# EAGLE board led_buzzer_panel (EAGLE 5.11)
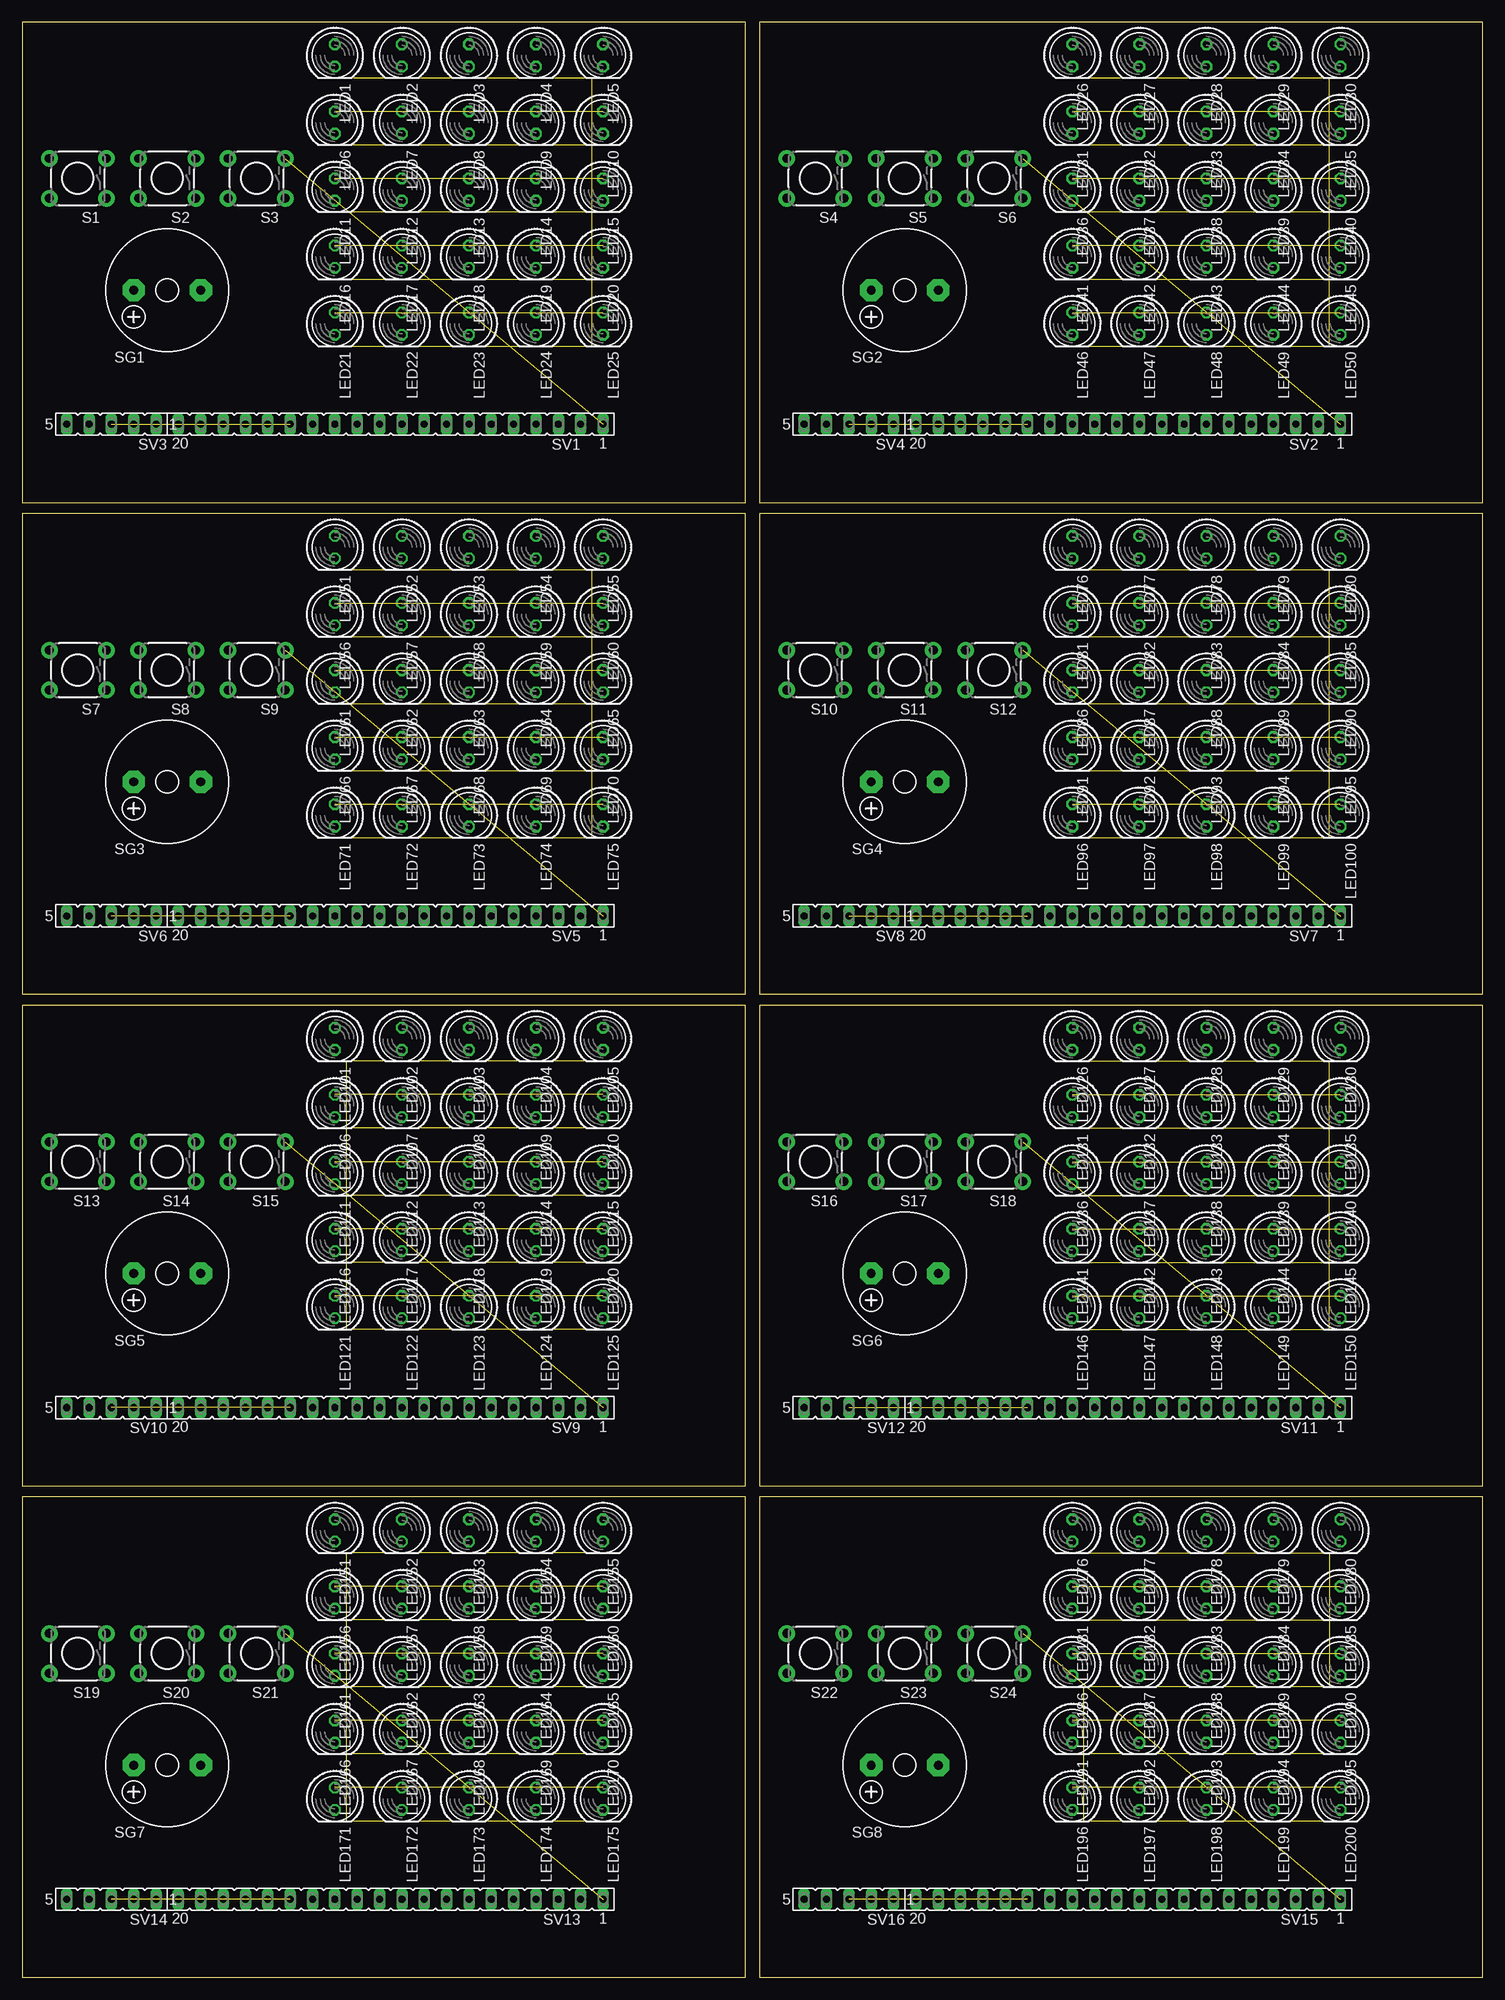
[diagram p0: board, top side]
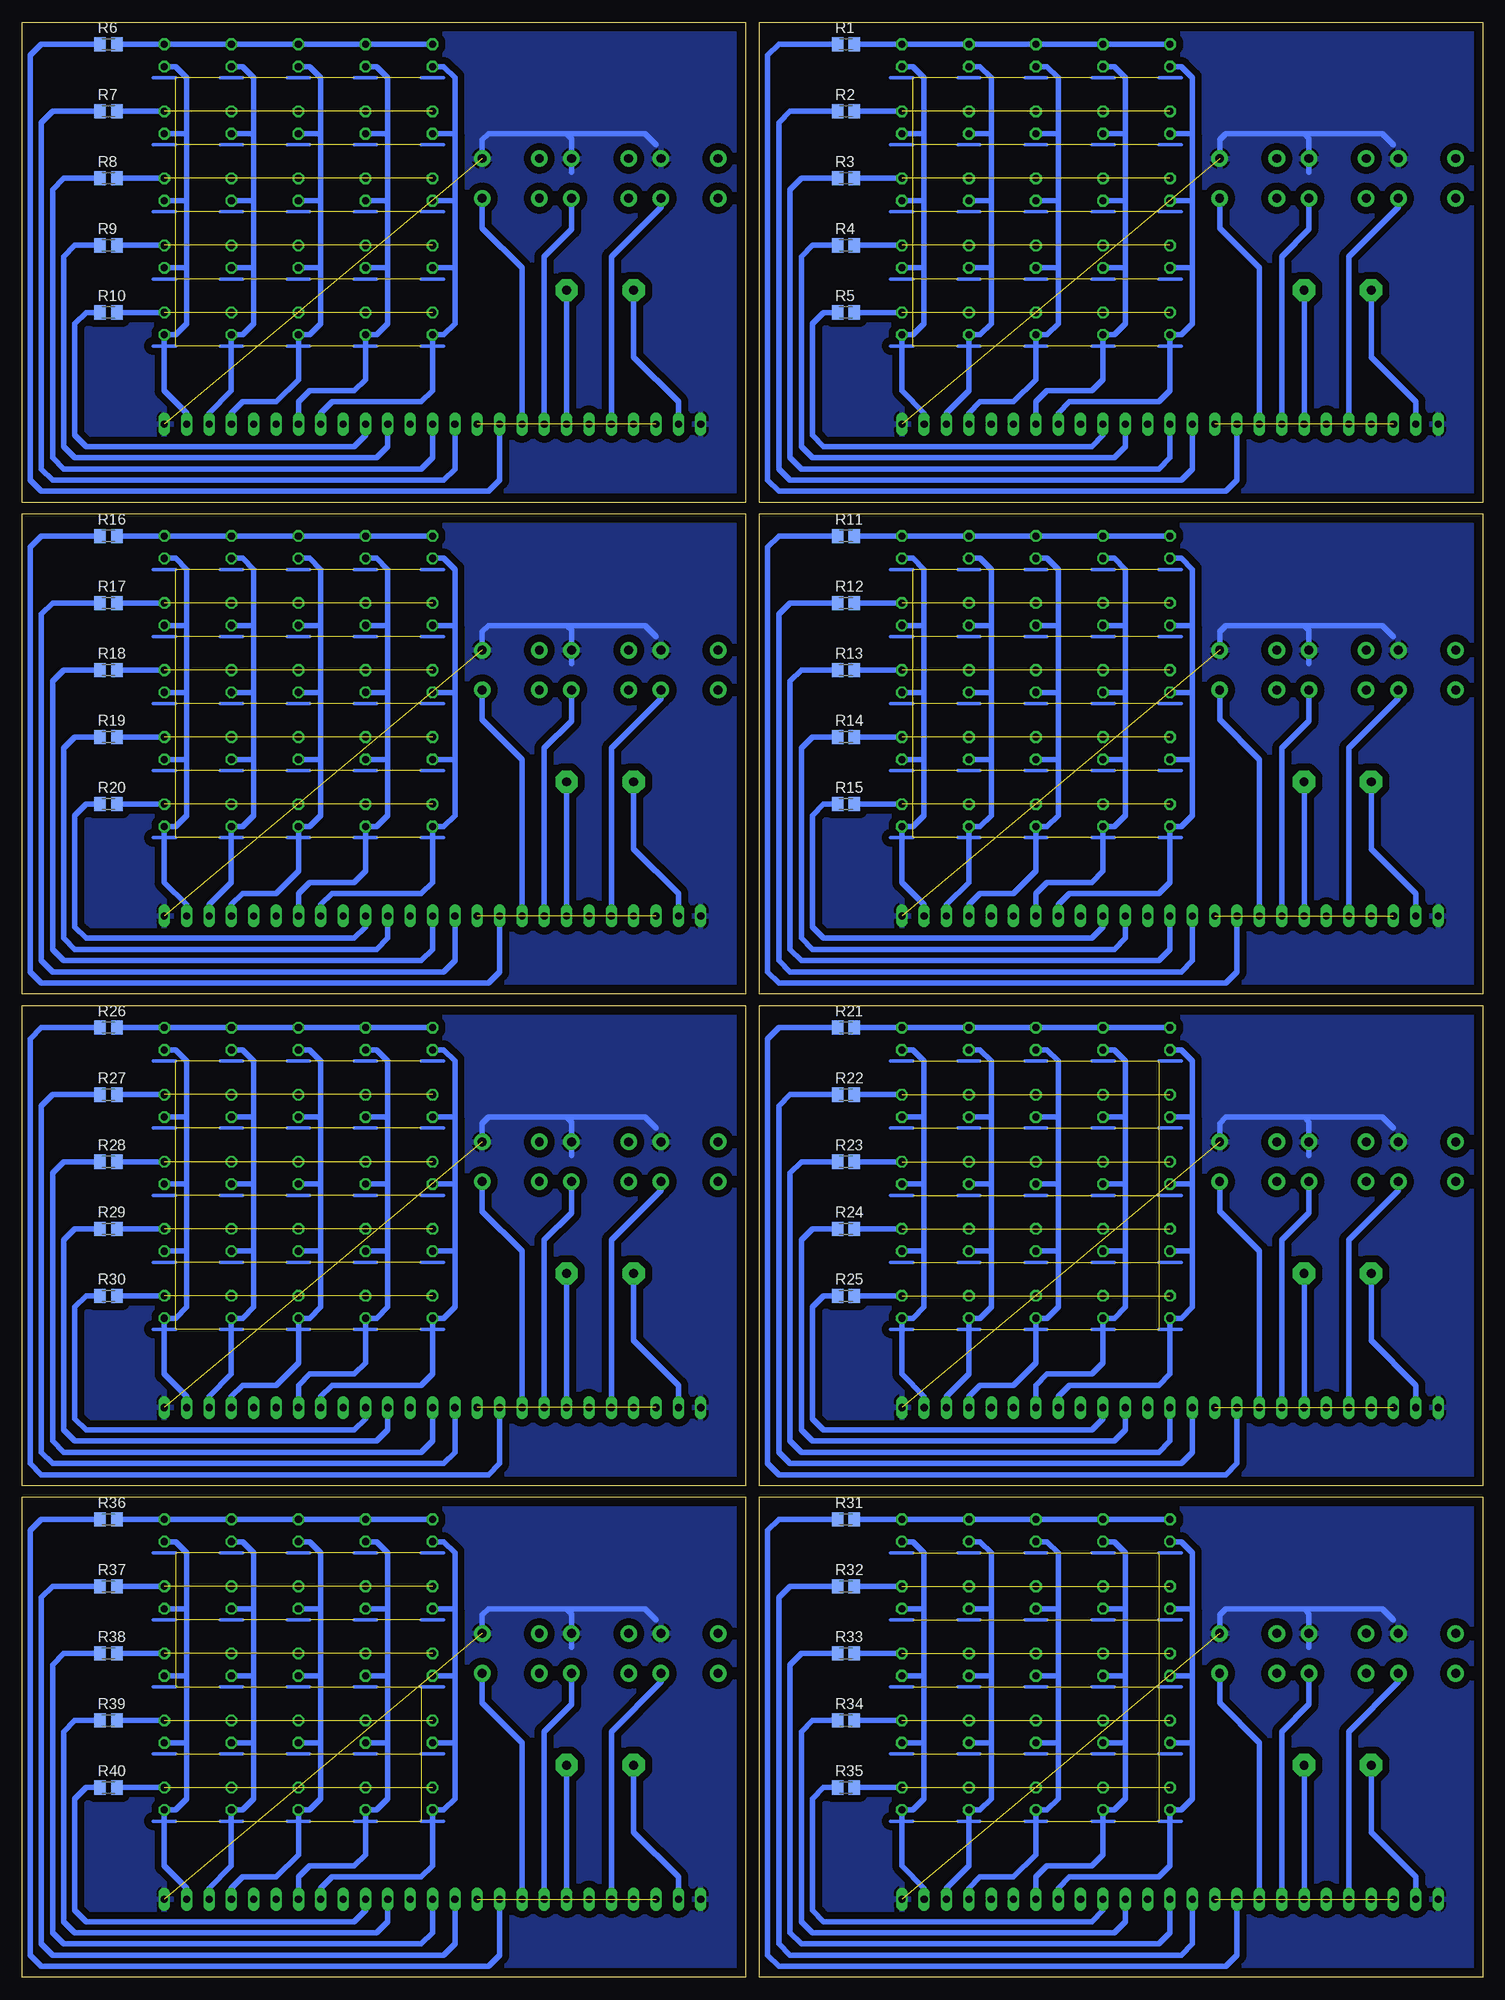
[diagram p1: board, bottom side, seen from below]

Size 166.04 x 222.24 mm. Coordinates in mm from the lower left corner, seen from the top.
Outline: 0,167.64 82.22,167.64 82.22,222.24 0,222.24 0,167.64
Outline: 83.82,167.64 166.04,167.64 166.04,222.24 83.82,222.24 83.82,167.64
Outline: 0,111.76 82.22,111.76 82.22,166.36 0,166.36 0,111.76
Outline: 83.82,111.76 166.04,111.76 166.04,166.36 83.82,166.36 83.82,111.76
Outline: 0,55.88 82.22,55.88 82.22,110.48 0,110.48 0,55.88
Outline: 83.82,55.88 166.04,55.88 166.04,110.48 83.82,110.48 83.82,55.88
Outline: 0,0 82.22,0 82.22,54.6 0,54.6 0,0
Outline: 83.82,0 166.04,0 166.04,54.6 83.82,54.6 83.82,0
Copper layers (1*16): Top 0.035mm / dielectric 1.5mm / Bottom 0.035mm
Design rules "default *": minimum track width 0.4mm, minimum drill 24mil, track to track 8mil, track to pad 8mil, pad to pad 8mil, via to via 8mil, smd to smd 8mil, copper to edge 40mil, drill to drill 8mil, minimum pad ring 10mil, minimum via ring 8mil, stop-mask expansion 4mil, vias tented up to drill 0mil, thermal gap 10mil

## Footprints (pad centres in the part's own frame; a part is rotated, then mirrored left to right if it is on the bottom)
LED5MM = drill 0.813 octagon: A -1.27,0; K 1.27,0
M0805 = smd 1.3 x 1.6: 1 -0.95,0; 2 0.95,0
TACTILE-PTH = drill 1.016 pad 1.88 round: 1 -3.251,2.261; 2 3.251,2.261; 3 -3.251,-2.261; 4 3.251,-2.261
F/CM12P = drill 1.016 pad 2.54 octagon: + 3.81,0; - -3.81,0
FE20 = drill 0.813 long: 1 -24.13,0; 2 -21.59,0; 3 -19.05,0; 4 -16.51,0; 5 -13.97,0; 6 -11.43,0; 7 -8.89,0; 8 -6.35,0; 9 -3.81,0; 10 -1.27,0; 11 1.27,0; 12 3.81,0; 13 6.35,0; 14 8.89,0; 15 11.43,0; 16 13.97,0; 17 16.51,0; 18 19.05,0; 19 21.59,0; 20 24.13,0
FE05-1 = drill 0.813 long: 1 -5.08,0; 2 -2.54,0; 3 0,0; 4 2.54,0; 5 5.08,0

## Placement (x,y rotation side)
LED1  [LED5MM]  35.56,218.44 270 top
LED2  [LED5MM]  43.18,218.44 270 top
LED3  [LED5MM]  50.8,218.44 270 top
LED4  [LED5MM]  58.42,218.44 270 top
LED5  [LED5MM]  66.04,218.44 270 top
LED6  [LED5MM]  35.56,210.82 270 top
LED7  [LED5MM]  43.18,210.82 270 top
LED8  [LED5MM]  50.8,210.82 270 top
LED9  [LED5MM]  58.42,210.82 270 top
LED10  [LED5MM]  66.04,210.82 270 top
LED11  [LED5MM]  35.56,203.2 270 top
LED12  [LED5MM]  43.18,203.2 270 top
LED13  [LED5MM]  50.8,203.2 270 top
LED14  [LED5MM]  58.42,203.2 270 top
LED15  [LED5MM]  66.04,203.2 270 top
LED16  [LED5MM]  35.56,195.58 270 top
LED17  [LED5MM]  43.18,195.58 270 top
LED18  [LED5MM]  50.8,195.58 270 top
LED19  [LED5MM]  58.42,195.58 270 top
LED20  [LED5MM]  66.04,195.58 270 top
LED21  [LED5MM]  35.56,187.96 270 top
LED22  [LED5MM]  43.18,187.96 270 top
LED23  [LED5MM]  50.8,187.96 270 top
LED24  [LED5MM]  58.42,187.96 270 top
LED25  [LED5MM]  66.04,187.96 270 top
LED26  [LED5MM]  119.38,218.44 270 top
LED27  [LED5MM]  127,218.44 270 top
LED28  [LED5MM]  134.62,218.44 270 top
LED29  [LED5MM]  142.24,218.44 270 top
LED30  [LED5MM]  149.86,218.44 270 top
LED31  [LED5MM]  119.38,210.82 270 top
LED32  [LED5MM]  127,210.82 270 top
LED33  [LED5MM]  134.62,210.82 270 top
LED34  [LED5MM]  142.24,210.82 270 top
LED35  [LED5MM]  149.86,210.82 270 top
LED36  [LED5MM]  119.38,203.2 270 top
LED37  [LED5MM]  127,203.2 270 top
LED38  [LED5MM]  134.62,203.2 270 top
LED39  [LED5MM]  142.24,203.2 270 top
LED40  [LED5MM]  149.86,203.2 270 top
LED41  [LED5MM]  119.38,195.58 270 top
LED42  [LED5MM]  127,195.58 270 top
LED43  [LED5MM]  134.62,195.58 270 top
LED44  [LED5MM]  142.24,195.58 270 top
LED45  [LED5MM]  149.86,195.58 270 top
LED46  [LED5MM]  119.38,187.96 270 top
LED47  [LED5MM]  127,187.96 270 top
LED48  [LED5MM]  134.62,187.96 270 top
LED49  [LED5MM]  142.24,187.96 270 top
LED50  [LED5MM]  149.86,187.96 270 top
LED51  [LED5MM]  35.56,162.56 270 top
LED52  [LED5MM]  43.18,162.56 270 top
LED53  [LED5MM]  50.8,162.56 270 top
LED54  [LED5MM]  58.42,162.56 270 top
LED55  [LED5MM]  66.04,162.56 270 top
LED56  [LED5MM]  35.56,154.94 270 top
LED57  [LED5MM]  43.18,154.94 270 top
LED58  [LED5MM]  50.8,154.94 270 top
LED59  [LED5MM]  58.42,154.94 270 top
LED60  [LED5MM]  66.04,154.94 270 top
LED61  [LED5MM]  35.56,147.32 270 top
LED62  [LED5MM]  43.18,147.32 270 top
LED63  [LED5MM]  50.8,147.32 270 top
LED64  [LED5MM]  58.42,147.32 270 top
LED65  [LED5MM]  66.04,147.32 270 top
LED66  [LED5MM]  35.56,139.7 270 top
LED67  [LED5MM]  43.18,139.7 270 top
LED68  [LED5MM]  50.8,139.7 270 top
LED69  [LED5MM]  58.42,139.7 270 top
LED70  [LED5MM]  66.04,139.7 270 top
LED71  [LED5MM]  35.56,132.08 270 top
LED72  [LED5MM]  43.18,132.08 270 top
LED73  [LED5MM]  50.8,132.08 270 top
LED74  [LED5MM]  58.42,132.08 270 top
LED75  [LED5MM]  66.04,132.08 270 top
LED76  [LED5MM]  119.38,162.56 270 top
LED77  [LED5MM]  127,162.56 270 top
LED78  [LED5MM]  134.62,162.56 270 top
LED79  [LED5MM]  142.24,162.56 270 top
LED80  [LED5MM]  149.86,162.56 270 top
LED81  [LED5MM]  119.38,154.94 270 top
LED82  [LED5MM]  127,154.94 270 top
LED83  [LED5MM]  134.62,154.94 270 top
LED84  [LED5MM]  142.24,154.94 270 top
LED85  [LED5MM]  149.86,154.94 270 top
LED86  [LED5MM]  119.38,147.32 270 top
LED87  [LED5MM]  127,147.32 270 top
LED88  [LED5MM]  134.62,147.32 270 top
LED89  [LED5MM]  142.24,147.32 270 top
LED90  [LED5MM]  149.86,147.32 270 top
LED91  [LED5MM]  119.38,139.7 270 top
LED92  [LED5MM]  127,139.7 270 top
LED93  [LED5MM]  134.62,139.7 270 top
LED94  [LED5MM]  142.24,139.7 270 top
LED95  [LED5MM]  149.86,139.7 270 top
LED96  [LED5MM]  119.38,132.08 270 top
LED97  [LED5MM]  127,132.08 270 top
LED98  [LED5MM]  134.62,132.08 270 top
LED99  [LED5MM]  142.24,132.08 270 top
LED100  [LED5MM]  149.86,132.08 270 top
LED101  [LED5MM]  35.56,106.68 270 top
LED102  [LED5MM]  43.18,106.68 270 top
LED103  [LED5MM]  50.8,106.68 270 top
LED104  [LED5MM]  58.42,106.68 270 top
LED105  [LED5MM]  66.04,106.68 270 top
LED106  [LED5MM]  35.56,99.06 270 top
LED107  [LED5MM]  43.18,99.06 270 top
LED108  [LED5MM]  50.8,99.06 270 top
LED109  [LED5MM]  58.42,99.06 270 top
LED110  [LED5MM]  66.04,99.06 270 top
LED111  [LED5MM]  35.56,91.44 270 top
LED112  [LED5MM]  43.18,91.44 270 top
LED113  [LED5MM]  50.8,91.44 270 top
LED114  [LED5MM]  58.42,91.44 270 top
LED115  [LED5MM]  66.04,91.44 270 top
LED116  [LED5MM]  35.56,83.82 270 top
LED117  [LED5MM]  43.18,83.82 270 top
LED118  [LED5MM]  50.8,83.82 270 top
LED119  [LED5MM]  58.42,83.82 270 top
LED120  [LED5MM]  66.04,83.82 270 top
LED121  [LED5MM]  35.56,76.2 270 top
LED122  [LED5MM]  43.18,76.2 270 top
LED123  [LED5MM]  50.8,76.2 270 top
LED124  [LED5MM]  58.42,76.2 270 top
LED125  [LED5MM]  66.04,76.2 270 top
LED126  [LED5MM]  119.38,106.68 270 top
LED127  [LED5MM]  127,106.68 270 top
LED128  [LED5MM]  134.62,106.68 270 top
LED129  [LED5MM]  142.24,106.68 270 top
LED130  [LED5MM]  149.86,106.68 270 top
LED131  [LED5MM]  119.38,99.06 270 top
LED132  [LED5MM]  127,99.06 270 top
LED133  [LED5MM]  134.62,99.06 270 top
LED134  [LED5MM]  142.24,99.06 270 top
LED135  [LED5MM]  149.86,99.06 270 top
LED136  [LED5MM]  119.38,91.44 270 top
LED137  [LED5MM]  127,91.44 270 top
LED138  [LED5MM]  134.62,91.44 270 top
LED139  [LED5MM]  142.24,91.44 270 top
LED140  [LED5MM]  149.86,91.44 270 top
LED141  [LED5MM]  119.38,83.82 270 top
LED142  [LED5MM]  127,83.82 270 top
LED143  [LED5MM]  134.62,83.82 270 top
LED144  [LED5MM]  142.24,83.82 270 top
LED145  [LED5MM]  149.86,83.82 270 top
LED146  [LED5MM]  119.38,76.2 270 top
LED147  [LED5MM]  127,76.2 270 top
LED148  [LED5MM]  134.62,76.2 270 top
LED149  [LED5MM]  142.24,76.2 270 top
LED150  [LED5MM]  149.86,76.2 270 top
LED151  [LED5MM]  35.56,50.8 270 top
LED152  [LED5MM]  43.18,50.8 270 top
LED153  [LED5MM]  50.8,50.8 270 top
LED154  [LED5MM]  58.42,50.8 270 top
LED155  [LED5MM]  66.04,50.8 270 top
LED156  [LED5MM]  35.56,43.18 270 top
LED157  [LED5MM]  43.18,43.18 270 top
LED158  [LED5MM]  50.8,43.18 270 top
LED159  [LED5MM]  58.42,43.18 270 top
LED160  [LED5MM]  66.04,43.18 270 top
LED161  [LED5MM]  35.56,35.56 270 top
LED162  [LED5MM]  43.18,35.56 270 top
LED163  [LED5MM]  50.8,35.56 270 top
LED164  [LED5MM]  58.42,35.56 270 top
LED165  [LED5MM]  66.04,35.56 270 top
LED166  [LED5MM]  35.56,27.94 270 top
LED167  [LED5MM]  43.18,27.94 270 top
LED168  [LED5MM]  50.8,27.94 270 top
LED169  [LED5MM]  58.42,27.94 270 top
LED170  [LED5MM]  66.04,27.94 270 top
LED171  [LED5MM]  35.56,20.32 270 top
LED172  [LED5MM]  43.18,20.32 270 top
LED173  [LED5MM]  50.8,20.32 270 top
LED174  [LED5MM]  58.42,20.32 270 top
LED175  [LED5MM]  66.04,20.32 270 top
LED176  [LED5MM]  119.38,50.8 270 top
LED177  [LED5MM]  127,50.8 270 top
LED178  [LED5MM]  134.62,50.8 270 top
LED179  [LED5MM]  142.24,50.8 270 top
LED180  [LED5MM]  149.86,50.8 270 top
LED181  [LED5MM]  119.38,43.18 270 top
LED182  [LED5MM]  127,43.18 270 top
LED183  [LED5MM]  134.62,43.18 270 top
LED184  [LED5MM]  142.24,43.18 270 top
LED185  [LED5MM]  149.86,43.18 270 top
LED186  [LED5MM]  119.38,35.56 270 top
LED187  [LED5MM]  127,35.56 270 top
LED188  [LED5MM]  134.62,35.56 270 top
LED189  [LED5MM]  142.24,35.56 270 top
LED190  [LED5MM]  149.86,35.56 270 top
LED191  [LED5MM]  119.38,27.94 270 top
LED192  [LED5MM]  127,27.94 270 top
LED193  [LED5MM]  134.62,27.94 270 top
LED194  [LED5MM]  142.24,27.94 270 top
LED195  [LED5MM]  149.86,27.94 270 top
LED196  [LED5MM]  119.38,20.32 270 top
LED197  [LED5MM]  127,20.32 270 top
LED198  [LED5MM]  134.62,20.32 270 top
LED199  [LED5MM]  142.24,20.32 270 top
LED200  [LED5MM]  149.86,20.32 270 top
R1  [M0805]  72.39,219.71 0 bottom
R2  [M0805]  72.39,212.09 0 bottom
R3  [M0805]  72.39,204.47 0 bottom
R4  [M0805]  72.39,196.85 0 bottom
R5  [M0805]  72.39,189.23 0 bottom
R6  [M0805]  156.21,219.71 0 bottom
R7  [M0805]  156.21,212.09 0 bottom
R8  [M0805]  156.21,204.47 0 bottom
R9  [M0805]  156.21,196.85 0 bottom
R10  [M0805]  156.21,189.23 0 bottom
R11  [M0805]  72.39,163.83 0 bottom
R12  [M0805]  72.39,156.21 0 bottom
R13  [M0805]  72.39,148.59 0 bottom
R14  [M0805]  72.39,140.97 0 bottom
R15  [M0805]  72.39,133.35 0 bottom
R16  [M0805]  156.21,163.83 0 bottom
R17  [M0805]  156.21,156.21 0 bottom
R18  [M0805]  156.21,148.59 0 bottom
R19  [M0805]  156.21,140.97 0 bottom
R20  [M0805]  156.21,133.35 0 bottom
R21  [M0805]  72.39,107.95 0 bottom
R22  [M0805]  72.39,100.33 0 bottom
R23  [M0805]  72.39,92.71 0 bottom
R24  [M0805]  72.39,85.09 0 bottom
R25  [M0805]  72.39,77.47 0 bottom
R26  [M0805]  156.21,107.95 0 bottom
R27  [M0805]  156.21,100.33 0 bottom
R28  [M0805]  156.21,92.71 0 bottom
R29  [M0805]  156.21,85.09 0 bottom
R30  [M0805]  156.21,77.47 0 bottom
R31  [M0805]  72.39,52.07 0 bottom
R32  [M0805]  72.39,44.45 0 bottom
R33  [M0805]  72.39,36.83 0 bottom
R34  [M0805]  72.39,29.21 0 bottom
R35  [M0805]  72.39,21.59 0 bottom
R36  [M0805]  156.21,52.07 0 bottom
R37  [M0805]  156.21,44.45 0 bottom
R38  [M0805]  156.21,36.83 0 bottom
R39  [M0805]  156.21,29.21 0 bottom
R40  [M0805]  156.21,21.59 0 bottom
S1  [TACTILE-PTH]  6.35,204.47 180 top
S2  [TACTILE-PTH]  16.51,204.47 180 top
S3  [TACTILE-PTH]  26.67,204.47 180 top
S4  [TACTILE-PTH]  90.17,204.47 180 top
S5  [TACTILE-PTH]  100.33,204.47 180 top
S6  [TACTILE-PTH]  110.49,204.47 180 top
S7  [TACTILE-PTH]  6.35,148.59 180 top
S8  [TACTILE-PTH]  16.51,148.59 180 top
S9  [TACTILE-PTH]  26.67,148.59 180 top
S10  [TACTILE-PTH]  90.17,148.59 180 top
S11  [TACTILE-PTH]  100.33,148.59 180 top
S12  [TACTILE-PTH]  110.49,148.59 180 top
S13  [TACTILE-PTH]  6.35,92.71 180 top
S14  [TACTILE-PTH]  16.51,92.71 180 top
S15  [TACTILE-PTH]  26.67,92.71 180 top
S16  [TACTILE-PTH]  90.17,92.71 180 top
S17  [TACTILE-PTH]  100.33,92.71 180 top
S18  [TACTILE-PTH]  110.49,92.71 180 top
S19  [TACTILE-PTH]  6.35,36.83 180 top
S20  [TACTILE-PTH]  16.51,36.83 180 top
S21  [TACTILE-PTH]  26.67,36.83 180 top
S22  [TACTILE-PTH]  90.17,36.83 180 top
S23  [TACTILE-PTH]  100.33,36.83 180 top
S24  [TACTILE-PTH]  110.49,36.83 180 top
SG1  F/CM12P  [F/CM12P]  16.51,191.77 180 top
SG2  F/CM12P  [F/CM12P]  100.33,191.77 180 top
SG3  F/CM12P  [F/CM12P]  16.51,135.89 180 top
SG4  F/CM12P  [F/CM12P]  100.33,135.89 180 top
SG5  F/CM12P  [F/CM12P]  16.51,80.01 180 top
SG6  F/CM12P  [F/CM12P]  100.33,80.01 180 top
SG7  F/CM12P  [F/CM12P]  16.51,24.13 180 top
SG8  F/CM12P  [F/CM12P]  100.33,24.13 180 top
SV1  [FE20]  41.91,176.53 180 top
SV2  [FE20]  125.73,176.53 180 top
SV3  [FE05-1]  10.16,176.53 180 top
SV4  [FE05-1]  93.98,176.53 180 top
SV5  [FE20]  41.91,120.65 180 top
SV6  [FE05-1]  10.16,120.65 180 top
SV7  [FE20]  125.73,120.65 180 top
SV8  [FE05-1]  93.98,120.65 180 top
SV9  [FE20]  41.91,64.77 180 top
SV10  [FE05-1]  10.16,64.77 180 top
SV11  [FE20]  125.73,64.77 180 top
SV12  [FE05-1]  93.98,64.77 180 top
SV13  [FE20]  41.91,8.89 180 top
SV14  [FE05-1]  10.16,8.89 180 top
SV15  [FE20]  125.73,8.89 180 top
SV16  [FE05-1]  93.98,8.89 180 top

## Library data of the parts
LED1-LED200 = led
R1-R40 = rcl
S1-S24 = SparkFun
SG1-SG8 = buzzer; OC_FARNELL: unknown; OC_NEWARK: unknown
SV1-SV16 = con-lsta; OC_FARNELL: unknown; OC_NEWARK: unknown

## Nets
+5V: SG1.+ SV3.4
+5V1: SG2.+ SV4.4
+5V2: SG3.+ SV6.4
+5V3: SG4.+ SV8.4
+5V4: SG5.+ SV10.4
+5V5: SG6.+ SV12.4
+5V6: SG7.+ SV14.4
+5V7: SG8.+ SV16.4
GND: S1.3 S2.3 S3.3 SV1.1 SV3.5
GND1: S4.3 S5.3 S6.3 SV2.1 SV4.5
GND2: S7.3 S8.3 S9.3 SV5.1 SV6.5
GND3: S10.3 S11.3 S12.3 SV7.1 SV8.5
GND4: S13.3 S14.3 S15.3 SV9.1 SV10.5
GND5: S16.3 S17.3 S18.3 SV11.1 SV12.5
GND6: S19.3 S20.3 S21.3 SV13.1 SV14.5
GND7: S22.3 S23.3 S24.3 SV15.1 SV16.5
N$1: LED1.A LED2.A LED3.A LED4.A LED5.A R1.2
N$2: LED6.A LED7.A LED8.A LED9.A LED10.A R2.2
N$3: LED11.A LED12.A LED13.A LED14.A LED15.A R3.2
N$4: LED16.A LED17.A LED18.A LED19.A LED20.A R4.2
N$5: LED21.A LED22.A LED23.A LED24.A LED25.A R5.2
N$8: LED26.A LED27.A LED28.A LED29.A LED30.A R6.2
N$9: LED31.A LED32.A LED33.A LED34.A LED35.A R7.2
N$10: LED36.A LED37.A LED38.A LED39.A LED40.A R8.2
N$11: LED41.A LED42.A LED43.A LED44.A LED45.A R9.2
N$12: LED46.A LED47.A LED48.A LED49.A LED50.A R10.2
N$15: LED51.A LED52.A LED53.A LED54.A LED55.A R11.2
N$16: LED56.A LED57.A LED58.A LED59.A LED60.A R12.2
N$17: LED61.A LED62.A LED63.A LED64.A LED65.A R13.2
N$18: LED66.A LED67.A LED68.A LED69.A LED70.A R14.2
N$19: LED71.A LED72.A LED73.A LED74.A LED75.A R15.2
N$22: LED76.A LED77.A LED78.A LED79.A LED80.A R16.2
N$23: LED81.A LED82.A LED83.A LED84.A LED85.A R17.2
N$24: LED86.A LED87.A LED88.A LED89.A LED90.A R18.2
N$25: LED91.A LED92.A LED93.A LED94.A LED95.A R19.2
N$26: LED96.A LED97.A LED98.A LED99.A LED100.A R20.2
N$29: LED101.A LED102.A LED103.A LED104.A LED105.A R21.2
N$30: LED106.A LED107.A LED108.A LED109.A LED110.A R22.2
N$31: LED111.A LED112.A LED113.A LED114.A LED115.A R23.2
N$32: LED116.A LED117.A LED118.A LED119.A LED120.A R24.2
N$33: LED121.A LED122.A LED123.A LED124.A LED125.A R25.2
N$36: LED126.A LED127.A LED128.A LED129.A LED130.A R26.2
N$37: LED131.A LED132.A LED133.A LED134.A LED135.A R27.2
N$38: LED136.A LED137.A LED138.A LED139.A LED140.A R28.2
N$39: LED141.A LED142.A LED143.A LED144.A LED145.A R29.2
N$40: LED146.A LED147.A LED148.A LED149.A LED150.A R30.2
N$43: LED151.A LED152.A LED153.A LED154.A LED155.A R31.2
N$44: LED156.A LED157.A LED158.A LED159.A LED160.A R32.2
N$45: LED161.A LED162.A LED163.A LED164.A LED165.A R33.2
N$46: LED166.A LED167.A LED168.A LED169.A LED170.A R34.2
N$47: LED171.A LED172.A LED173.A LED174.A LED175.A R35.2
N$50: LED176.A LED177.A LED178.A LED179.A LED180.A R36.2
N$51: LED181.A LED182.A LED183.A LED184.A LED185.A R37.2
N$52: LED186.A LED187.A LED188.A LED189.A LED190.A R38.2
N$53: LED191.A LED192.A LED193.A LED194.A LED195.A R39.2
N$54: LED196.A LED197.A LED198.A LED199.A LED200.A R40.2
PA1: LED28.K LED33.K LED38.K LED43.K LED48.K SV2.4
PA2: SV2.5
PA3: SV2.6
PA4: LED53.K LED58.K LED63.K LED68.K LED73.K SV5.4
PA5: SV5.5
PA6: SV5.6
PA7: LED78.K LED83.K LED88.K LED93.K LED98.K SV7.4
PA8: SV7.5
PA9: LED3.K LED8.K LED13.K LED18.K LED23.K SV1.4
PA10: SV7.6
PA11: LED103.K LED108.K LED113.K LED118.K LED123.K SV9.4
PA12: SV9.5
PA13: SV1.5
PA14: SV9.6
PA15: SV1.6
PA16: LED128.K LED133.K LED138.K LED143.K LED148.K SV11.4
PA17: SV11.5
PA18: SV11.6
PA19: LED153.K LED158.K LED163.K LED168.K LED173.K SV13.4
PA20: SV13.5
PA21: SV13.6
PA22: LED178.K LED183.K LED188.K LED193.K LED198.K SV15.4
PA23: SV15.5
PA24: SV15.6
PB1: SV2.12
PB2: R8.1 SV2.13
PB3: SV1.12
PB4: R7.1 SV2.14
PB5: R3.1 SV1.13
PB6: R6.1 SV2.16
PB7: R2.1 SV1.14
PB8: SV5.12
PB9: R1.1 SV1.16
PB10: R13.1 SV5.13
PB11: R12.1 SV5.14
PB12: R11.1 SV5.16
PB13: SV7.12
PB14: R18.1 SV7.13
PB15: R17.1 SV7.14
PB16: R16.1 SV7.16
PB17: SV9.12
PB18: R23.1 SV9.13
PB19: R22.1 SV9.14
PB20: R21.1 SV9.16
PB21: SV11.12
PB22: R28.1 SV11.13
PB23: R27.1 SV11.14
PB24: R26.1 SV11.16
PB25: SV13.12
PB26: R33.1 SV13.13
PB27: R32.1 SV13.14
PB28: R31.1 SV13.16
PB29: SV15.12
PB30: R38.1 SV15.13
PB31: R37.1 SV15.14
PB32: R36.1 SV15.16
PC1: LED29.K LED34.K LED39.K LED44.K LED49.K SV2.3
PC2: LED30.K LED35.K LED40.K LED45.K LED50.K SV2.2
PC3: LED27.K LED32.K LED37.K LED42.K LED47.K SV2.7
PC4: SV2.20
PC5: S4.1 SV4.1
PC6: LED54.K LED59.K LED64.K LED69.K LED74.K SV5.3
PC7: LED5.K LED10.K LED15.K LED20.K LED25.K SV1.2
PC8: LED55.K LED60.K LED65.K LED70.K LED75.K SV5.2
PC9: LED4.K LED9.K LED14.K LED19.K LED24.K SV1.3
PC10: LED52.K LED57.K LED62.K LED67.K LED72.K SV5.7
PC11: LED2.K LED7.K LED12.K LED17.K LED22.K SV1.7
PC12: SV5.20
PC13: SV1.20
PC14: S7.1 SV6.1
PC15: S1.1 SV3.1
PC16: LED79.K LED84.K LED89.K LED94.K LED99.K SV7.3
PC17: LED80.K LED85.K LED90.K LED95.K LED100.K SV7.2
PC18: LED77.K LED82.K LED87.K LED92.K LED97.K SV7.7
PC19: SV7.20
PC20: S10.1 SV8.1
PC21: LED104.K LED109.K LED114.K LED119.K LED124.K SV9.3
PC22: LED105.K LED110.K LED115.K LED120.K LED125.K SV9.2
PC23: LED102.K LED107.K LED112.K LED117.K LED122.K SV9.7
PC24: SV9.20
PC25: S13.1 SV10.1
PC26: LED129.K LED134.K LED139.K LED144.K LED149.K SV11.3
PC27: LED130.K LED135.K LED140.K LED145.K LED150.K SV11.2
PC28: LED127.K LED132.K LED137.K LED142.K LED147.K SV11.7
PC29: SV11.20
PC30: S16.1 SV12.1
PC31: LED154.K LED159.K LED164.K LED169.K LED174.K SV13.3
PC32: LED155.K LED160.K LED165.K LED170.K LED175.K SV13.2
PC33: LED152.K LED157.K LED162.K LED167.K LED172.K SV13.7
PC34: SV13.20
PC35: S19.1 SV14.1
PC36: LED179.K LED184.K LED189.K LED194.K LED199.K SV15.3
PC37: LED180.K LED185.K LED190.K LED195.K LED200.K SV15.2
PC38: LED177.K LED182.K LED187.K LED192.K LED197.K SV15.7
PC39: SV15.20
PC40: S22.1 SV16.1
PD0: LED1.K LED6.K LED11.K LED16.K LED21.K SV1.8
PD1: LED26.K LED31.K LED36.K LED41.K LED46.K SV2.8
PD2: SV1.9
PD3: SV2.9
PD4: R5.1 SV1.10
PD5: R10.1 SV2.10
PD6: R4.1 SV1.11
PD7: R9.1 SV2.11
PD8: LED51.K LED56.K LED61.K LED66.K LED71.K SV5.8
PD9: SV5.9
PD10: R15.1 SV5.10
PD11: R14.1 SV5.11
PD12: LED76.K LED81.K LED86.K LED91.K LED96.K SV7.8
PD13: SV7.9
PD14: R20.1 SV7.10
PD15: R19.1 SV7.11
PD16: LED101.K LED106.K LED111.K LED116.K LED121.K SV9.8
PD17: SV9.9
PD18: R25.1 SV9.10
PD19: R24.1 SV9.11
PD20: LED126.K LED131.K LED136.K LED141.K LED146.K SV11.8
PD21: SV11.9
PD22: R30.1 SV11.10
PD23: R29.1 SV11.11
PD24: LED151.K LED156.K LED161.K LED166.K LED171.K SV13.8
PD25: SV13.9
PD26: R35.1 SV13.10
PD27: R34.1 SV13.11
PD28: LED176.K LED181.K LED186.K LED191.K LED196.K SV15.8
PD29: SV15.9
PD30: R40.1 SV15.10
PD31: R39.1 SV15.11
PE1: S3.1 SV1.17
PE2: S6.1 SV2.17
PE3: S2.1 SV1.18
PE4: S5.1 SV2.18
PE5: SG1.- SV1.19
PE6: SG2.- SV2.19
PE7: S9.1 SV5.17
PE8: S8.1 SV5.18
PE9: SG3.- SV5.19
PE10: S12.1 SV7.17
PE11: S11.1 SV7.18
PE12: SG4.- SV7.19
PE13: S15.1 SV9.17
PE14: S14.1 SV9.18
PE15: SG5.- SV9.19
PE16: S18.1 SV11.17
PE17: S17.1 SV11.18
PE18: SG6.- SV11.19
PE19: S21.1 SV13.17
PE20: S20.1 SV13.18
PE21: SG7.- SV13.19
PE22: S24.1 SV15.17
PE23: S23.1 SV15.18
PE24: SG8.- SV15.19
PH1: SV3.2
PH2: SV4.2
PH3: SV6.2
PH4: SV8.2
PH5: SV10.2
PH6: SV12.2
PH7: SV14.2
PH8: SV16.2
VDD: SV1.15 SV3.3
VDD1: SV2.15 SV4.3
VDD2: SV5.15 SV6.3
VDD3: SV7.15 SV8.3
VDD4: SV9.15 SV10.3
VDD5: SV11.15 SV12.3
VDD6: SV13.15 SV14.3
VDD7: SV15.15 SV16.3

## Tracks (layer width: path | path; a pad name or v marks a point on that pad's centre or on a via)
+5V
  Bottom 0.61: SG1.+ 12.7,184.15 7.62,179.07 SV3.4
+5V1
  Bottom 0.61: SG2.+ 96.52,184.15 91.44,179.07 SV4.4
+5V2
  Bottom 0.61: SG3.+ 12.7,128.27 7.62,123.19 SV6.4
+5V3
  Bottom 0.61: SG4.+ 96.52,128.27 91.44,123.19 SV8.4
+5V4
  Bottom 0.61: SG5.+ 12.7,72.39 7.62,67.31 SV10.4
+5V5
  Bottom 0.61: SG6.+ 96.52,72.39 91.44,67.31 SV12.4
+5V6
  Bottom 0.61: SG7.+ 12.7,16.51 7.62,11.43 SV14.4
+5V7
  Bottom 0.61: SG8.+ 96.52,16.51 91.44,11.43 SV16.4
GND  (1 unrouted)
  Bottom 0.61: 19.76,205.18 S2.3 19.76,208.99 20.32,209.55 | S3.3 29.92,208.84 29.21,209.55 20.32,209.55 | 20.32,209.55 11.43,209.55 10.16,208.28 | S1.3 9.6,206.45
  pour Bottom (isolate 0.813): 0,222.25 0,167.64 82.55,167.64 82.55,222.25
  pour Bottom: 0,222.25 0,209.55 31.75,209.55 31.75,222.25
GND1  (1 unrouted)
  Bottom 0.61: 103.58,205.18 S5.3 103.58,208.99 104.14,209.55 | S6.3 113.74,208.84 113.03,209.55 104.14,209.55 | 104.14,209.55 95.25,209.55 93.98,208.28 | S4.3 93.42,206.45
  pour Bottom (isolate 0.813): 83.82,222.25 83.82,167.64 166.37,167.64 166.37,222.25
  pour Bottom: 83.82,222.25 83.82,209.55 115.57,209.55 115.57,222.25
GND2  (1 unrouted)
  Bottom 0.61: 19.76,149.3 S8.3 19.76,153.11 20.32,153.67 | S9.3 29.92,152.96 29.21,153.67 20.32,153.67 | 20.32,153.67 11.43,153.67 10.16,152.4 | S7.3 9.6,150.57
  pour Bottom (isolate 0.813): 0,166.37 0,111.76 82.55,111.76 82.55,166.37
  pour Bottom: 0,166.37 0,153.67 31.75,153.67 31.75,166.37
GND3  (1 unrouted)
  Bottom 0.61: 103.58,149.3 S11.3 103.58,153.11 104.14,153.67 | S12.3 113.74,152.96 113.03,153.67 104.14,153.67 | 104.14,153.67 95.25,153.67 93.98,152.4 | S10.3 93.42,150.57
  pour Bottom (isolate 0.813): 83.82,166.37 83.82,111.76 166.37,111.76 166.37,166.37
  pour Bottom: 83.82,166.37 83.82,153.67 115.57,153.67 115.57,166.37
GND4  (1 unrouted)
  Bottom 0.61: 19.76,93.42 S14.3 19.76,97.23 20.32,97.79 | S15.3 29.92,97.08 29.21,97.79 20.32,97.79 | 20.32,97.79 11.43,97.79 10.16,96.52 | S13.3 9.6,94.69
  pour Bottom (isolate 0.813): 0,110.49 0,55.88 82.55,55.88 82.55,110.49
  pour Bottom: 0,110.49 0,97.79 31.75,97.79 31.75,110.49
GND5  (1 unrouted)
  Bottom 0.61: 103.58,93.42 S17.3 103.58,97.23 104.14,97.79 | S18.3 113.74,97.08 113.03,97.79 104.14,97.79 | 104.14,97.79 95.25,97.79 93.98,96.52 | S16.3 93.42,94.69
  pour Bottom (isolate 0.813): 83.82,110.49 83.82,55.88 166.37,55.88 166.37,110.49
  pour Bottom: 83.82,110.49 83.82,97.79 115.57,97.79 115.57,110.49
GND6  (1 unrouted)
  Bottom 0.61: 19.76,37.54 S20.3 19.76,41.35 20.32,41.91 | S21.3 29.92,41.2 29.21,41.91 20.32,41.91 | 20.32,41.91 11.43,41.91 10.16,40.64 | S19.3 9.6,38.81
  pour Bottom (isolate 0.813): 0,54.61 0,0 82.55,0 82.55,54.61
  pour Bottom: 0,54.61 0,41.91 31.75,41.91 31.75,54.61
GND7  (1 unrouted)
  Bottom 0.61: 103.58,37.54 S23.3 103.58,41.35 104.14,41.91 | S24.3 113.74,41.2 113.03,41.91 104.14,41.91 | 104.14,41.91 95.25,41.91 93.98,40.64 | S22.3 93.42,38.81
  pour Bottom (isolate 0.813): 83.82,54.61 83.82,0 166.37,0 166.37,54.61
  pour Bottom: 83.82,54.61 83.82,41.91 115.57,41.91 115.57,54.61
N$1
  Bottom 0.61: R1.2 LED5.A LED4.A LED3.A LED2.A LED1.A
N$2  (4 unrouted)
  Bottom 0.61: LED10.A R2.2
N$3  (4 unrouted)
  Bottom 0.61: LED15.A R3.2
N$4  (4 unrouted)
  Bottom 0.61: LED20.A R4.2
N$5  (4 unrouted)
  Bottom 0.61: LED25.A R5.2
N$6  (24 unrouted)
  Bottom 0.406: 64.77,215.9 67.31,215.9 | 57.15,215.9 59.69,215.9 | 49.53,215.9 52.07,215.9 | 41.91,215.9 44.45,215.9 | 34.29,215.9 36.83,215.9 | 34.29,208.28 36.83,208.28 | 41.91,208.28 44.45,208.28 | 49.53,208.28 52.07,208.28 | 57.15,208.28 59.69,208.28 | 64.77,208.28 67.31,208.28 | 64.77,200.66 67.31,200.66 | 57.15,200.66 59.69,200.66 | 49.53,200.66 52.07,200.66 | 41.91,200.66 44.45,200.66 | 34.29,200.66 36.83,200.66 | 34.29,193.04 36.83,193.04 | 41.91,193.04 44.45,193.04 | 49.53,193.04 52.07,193.04 | 57.15,193.04 59.69,193.04 | 64.77,193.04 67.31,193.04 | 57.15,185.42 59.69,185.42 | 49.53,185.42 52.07,185.42 | 41.91,185.42 44.45,185.42 | 34.29,185.42 36.83,185.42 | 64.77,185.42 67.31,185.42 64.77,185.42
N$7
  pour Bottom: 3.81,195.58 10.16,195.58 10.16,187.96 3.81,187.96
N$8
  Bottom 0.61: R6.2 LED30.A LED29.A LED28.A LED27.A LED26.A
N$9  (4 unrouted)
  Bottom 0.61: LED35.A R7.2
N$10  (4 unrouted)
  Bottom 0.61: LED40.A R8.2
N$11  (4 unrouted)
  Bottom 0.61: LED45.A R9.2
N$12  (4 unrouted)
  Bottom 0.61: LED50.A R10.2
N$13  (24 unrouted)
  Bottom 0.406: 148.59,215.9 151.13,215.9 | 140.97,215.9 143.51,215.9 | 133.35,215.9 135.89,215.9 | 125.73,215.9 128.27,215.9 | 118.11,215.9 120.65,215.9 | 118.11,208.28 120.65,208.28 | 125.73,208.28 128.27,208.28 | 133.35,208.28 135.89,208.28 | 140.97,208.28 143.51,208.28 | 148.59,208.28 151.13,208.28 | 148.59,200.66 151.13,200.66 | 140.97,200.66 143.51,200.66 | 133.35,200.66 135.89,200.66 | 125.73,200.66 128.27,200.66 | 118.11,200.66 120.65,200.66 | 118.11,193.04 120.65,193.04 | 125.73,193.04 128.27,193.04 | 133.35,193.04 135.89,193.04 | 140.97,193.04 143.51,193.04 | 148.59,193.04 151.13,193.04 | 140.97,185.42 143.51,185.42 | 133.35,185.42 135.89,185.42 | 125.73,185.42 128.27,185.42 | 118.11,185.42 120.65,185.42 | 148.59,185.42 151.13,185.42 148.59,185.42
N$14
  pour Bottom: 87.63,195.58 93.98,195.58 93.98,187.96 87.63,187.96
N$15
  Bottom 0.61: R11.2 LED55.A LED54.A LED53.A LED52.A LED51.A
N$16  (4 unrouted)
  Bottom 0.61: LED60.A R12.2
N$17  (4 unrouted)
  Bottom 0.61: LED65.A R13.2
N$18  (4 unrouted)
  Bottom 0.61: LED70.A R14.2
N$19  (4 unrouted)
  Bottom 0.61: LED75.A R15.2
N$20  (24 unrouted)
  Bottom 0.406: 64.77,160.02 67.31,160.02 | 57.15,160.02 59.69,160.02 | 49.53,160.02 52.07,160.02 | 41.91,160.02 44.45,160.02 | 34.29,160.02 36.83,160.02 | 34.29,152.4 36.83,152.4 | 41.91,152.4 44.45,152.4 | 49.53,152.4 52.07,152.4 | 57.15,152.4 59.69,152.4 | 64.77,152.4 67.31,152.4 | 64.77,144.78 67.31,144.78 | 57.15,144.78 59.69,144.78 | 49.53,144.78 52.07,144.78 | 41.91,144.78 44.45,144.78 | 34.29,144.78 36.83,144.78 | 34.29,137.16 36.83,137.16 | 41.91,137.16 44.45,137.16 | 49.53,137.16 52.07,137.16 | 57.15,137.16 59.69,137.16 | 64.77,137.16 67.31,137.16 | 57.15,129.54 59.69,129.54 | 49.53,129.54 52.07,129.54 | 41.91,129.54 44.45,129.54 | 36.83,129.54 34.29,129.54 | 64.77,129.54 67.31,129.54 64.77,129.54
N$21
  pour Bottom: 3.81,139.7 10.16,139.7 10.16,132.08 3.81,132.08
N$22
  Bottom 0.61: R16.2 LED80.A LED79.A LED78.A LED77.A LED76.A
N$23  (4 unrouted)
  Bottom 0.61: LED85.A R17.2
N$24  (4 unrouted)
  Bottom 0.61: LED90.A R18.2
N$25  (4 unrouted)
  Bottom 0.61: LED95.A R19.2
N$26  (4 unrouted)
  Bottom 0.61: LED100.A R20.2
N$27  (24 unrouted)
  Bottom 0.406: 148.59,160.02 151.13,160.02 | 140.97,160.02 143.51,160.02 | 133.35,160.02 135.89,160.02 | 125.73,160.02 128.27,160.02 | 118.11,160.02 120.65,160.02 | 118.11,152.4 120.65,152.4 | 125.73,152.4 128.27,152.4 | 133.35,152.4 135.89,152.4 | 140.97,152.4 143.51,152.4 | 148.59,152.4 151.13,152.4 | 148.59,144.78 151.13,144.78 | 140.97,144.78 143.51,144.78 | 133.35,144.78 135.89,144.78 | 125.73,144.78 128.27,144.78 | 118.11,144.78 120.65,144.78 | 118.11,137.16 120.65,137.16 | 125.73,137.16 128.27,137.16 | 133.35,137.16 135.89,137.16 | 140.97,137.16 143.51,137.16 | 148.59,137.16 151.13,137.16 | 140.97,129.54 143.51,129.54 | 133.35,129.54 135.89,129.54 | 125.73,129.54 128.27,129.54 | 118.11,129.54 120.65,129.54 | 148.59,129.54 151.13,129.54 148.59,129.54
N$28
  pour Bottom: 87.63,139.7 93.98,139.7 93.98,132.08 87.63,132.08
N$29
  Bottom 0.61: R21.2 LED105.A LED104.A LED103.A LED102.A LED101.A
N$30  (4 unrouted)
  Bottom 0.61: LED110.A R22.2
N$31  (4 unrouted)
  Bottom 0.61: R23.2 LED115.A
N$32  (4 unrouted)
  Bottom 0.61: R24.2 LED120.A
N$33  (4 unrouted)
  Bottom 0.61: R25.2 LED125.A
N$34  (24 unrouted)
  Bottom 0.406: 64.77,104.14 67.31,104.14 | 59.69,104.14 57.15,104.14 | 52.07,104.14 49.53,104.14 | 44.45,104.14 41.91,104.14 | 36.83,104.14 34.29,104.14 | 36.83,96.52 34.29,96.52 | 44.45,96.52 41.91,96.52 | 52.07,96.52 49.53,96.52 | 59.69,96.52 57.15,96.52 | 67.31,96.52 64.77,96.52 | 67.31,88.9 64.77,88.9 | 59.69,88.9 57.15,88.9 | 52.07,88.9 49.53,88.9 | 44.45,88.9 41.91,88.9 | 36.83,88.9 34.29,88.9 | 36.83,81.28 34.29,81.28 | 44.45,81.28 41.91,81.28 | 52.07,81.28 49.53,81.28 | 59.69,81.28 57.15,81.28 | 67.31,81.28 64.77,81.28 | 59.69,73.66 57.15,73.66 | 52.07,73.66 49.53,73.66 | 44.45,73.66 41.91,73.66 | 36.83,73.66 34.29,73.66 | 67.31,73.66 64.77,73.66 67.31,73.66
N$35
  pour Bottom: 3.81,83.82 10.16,83.82 10.16,76.2 3.81,76.2
N$36
  Bottom 0.61: R26.2 LED130.A LED129.A LED128.A LED127.A LED126.A
N$37  (4 unrouted)
  Bottom 0.61: LED135.A R27.2
N$38  (4 unrouted)
  Bottom 0.61: LED140.A R28.2
N$39  (4 unrouted)
  Bottom 0.61: LED145.A R29.2
N$40  (4 unrouted)
  Bottom 0.61: LED150.A R30.2
N$41  (24 unrouted)
  Bottom 0.406: 148.59,104.14 151.13,104.14 | 140.97,104.14 143.51,104.14 | 133.35,104.14 135.89,104.14 | 125.73,104.14 128.27,104.14 | 118.11,104.14 120.65,104.14 | 118.11,96.52 120.65,96.52 | 125.73,96.52 128.27,96.52 | 133.35,96.52 135.89,96.52 | 140.97,96.52 143.51,96.52 | 148.59,96.52 151.13,96.52 | 148.59,88.9 151.13,88.9 | 140.97,88.9 143.51,88.9 | 133.35,88.9 135.89,88.9 | 125.73,88.9 128.27,88.9 | 118.11,88.9 120.65,88.9 | 118.11,81.28 120.65,81.28 | 125.73,81.28 128.27,81.28 | 133.35,81.28 135.89,81.28 | 140.97,81.28 143.51,81.28 | 148.59,81.28 151.13,81.28 | 140.97,73.66 143.51,73.66 | 133.35,73.66 135.89,73.66 | 125.73,73.66 128.27,73.66 | 118.11,73.66 120.65,73.66 | 148.59,73.66 151.13,73.66 148.59,73.66
N$42
  pour Bottom: 87.63,83.82 93.98,83.82 93.98,76.2 87.63,76.2
N$43
  Bottom 0.61: R31.2 LED155.A LED154.A LED153.A LED152.A LED151.A
N$44  (4 unrouted)
  Bottom 0.61: R32.2 LED160.A
N$45  (4 unrouted)
  Bottom 0.61: R33.2 LED165.A
N$46  (4 unrouted)
  Bottom 0.61: R34.2 LED170.A
N$47  (4 unrouted)
  Bottom 0.61: R35.2 LED175.A
N$48  (24 unrouted)
  Bottom 0.406: 67.31,48.26 64.77,48.26 | 59.69,48.26 57.15,48.26 | 52.07,48.26 49.53,48.26 | 44.45,48.26 41.91,48.26 | 36.83,48.26 34.29,48.26 | 36.83,40.64 34.29,40.64 | 44.45,40.64 41.91,40.64 | 52.07,40.64 49.53,40.64 | 59.69,40.64 57.15,40.64 | 67.31,40.64 64.77,40.64 | 67.31,33.02 64.77,33.02 | 59.69,33.02 57.15,33.02 | 52.07,33.02 49.53,33.02 | 44.45,33.02 41.91,33.02 | 36.83,33.02 34.29,33.02 | 36.83,25.4 34.29,25.4 | 44.45,25.4 41.91,25.4 | 52.07,25.4 49.53,25.4 | 59.69,25.4 57.15,25.4 | 67.31,25.4 64.77,25.4 | 59.69,17.78 57.15,17.78 | 52.07,17.78 49.53,17.78 | 44.45,17.78 41.91,17.78 | 36.83,17.78 34.29,17.78 | 67.31,17.78 64.77,17.78 67.31,17.78
N$49
  pour Bottom: 3.81,27.94 10.16,27.94 10.16,20.32 3.81,20.32
N$50
  Bottom 0.61: R36.2 LED180.A LED179.A LED178.A LED177.A LED176.A
N$51  (4 unrouted)
  Bottom 0.61: LED185.A R37.2
N$52  (4 unrouted)
  Bottom 0.61: LED190.A R38.2
N$53  (4 unrouted)
  Bottom 0.61: LED195.A R39.2
N$54  (4 unrouted)
  Bottom 0.61: LED200.A R40.2
N$55  (24 unrouted)
  Bottom 0.406: 148.59,48.26 151.13,48.26 | 140.97,48.26 143.51,48.26 | 133.35,48.26 135.89,48.26 | 125.73,48.26 128.27,48.26 | 120.65,48.26 118.11,48.26 | 120.65,40.64 118.11,40.64 | 128.27,40.64 125.73,40.64 | 133.35,40.64 135.89,40.64 | 140.97,40.64 143.51,40.64 | 148.59,40.64 151.13,40.64 | 148.59,33.02 151.13,33.02 | 140.97,33.02 143.51,33.02 | 135.89,33.02 133.35,33.02 | 128.27,33.02 125.73,33.02 | 120.65,33.02 118.11,33.02 | 120.65,25.4 118.11,25.4 | 128.27,25.4 125.73,25.4 | 135.89,25.4 133.35,25.4 | 143.51,25.4 140.97,25.4 | 148.59,25.4 151.13,25.4 | 143.51,17.78 140.97,17.78 | 135.89,17.78 133.35,17.78 | 128.27,17.78 125.73,17.78 | 120.65,17.78 118.11,17.78 | 151.13,17.78 148.59,17.78 151.13,17.78
N$56
  pour Bottom: 87.63,27.94 93.98,27.94 93.98,20.32 87.63,20.32
PA1
  Bottom 0.61: SV2.4 142.24,177.8 140.97,179.07 137.16,179.07 134.62,181.61 LED48.K 133.35,186.69 132.08,187.96 132.08,194.31 | LED28.K 133.35,217.17 132.08,215.9 132.08,209.55 | 132.08,194.31 132.08,201.93 | 132.08,201.93 132.08,209.55 | 132.08,209.55 LED33.K | 132.08,201.93 LED38.K | 132.08,194.31 LED43.K
PA4
  Bottom 0.61: SV5.4 58.42,121.92 57.15,123.19 53.34,123.19 50.8,125.73 LED73.K 49.53,130.81 48.26,132.08 48.26,138.43 | LED53.K 49.53,161.29 48.26,160.02 48.26,153.67 | 48.26,138.43 48.26,146.05 | 48.26,146.05 48.26,153.67 | 48.26,153.67 LED58.K | 48.26,146.05 LED63.K | 48.26,138.43 LED68.K
PA7
  Bottom 0.61: SV7.4 142.24,121.92 140.97,123.19 137.16,123.19 134.62,125.73 LED98.K 133.35,130.81 132.08,132.08 132.08,138.43 | LED78.K 133.35,161.29 132.08,160.02 132.08,153.67 | 132.08,138.43 132.08,146.05 | 132.08,146.05 132.08,153.67 | 132.08,153.67 LED83.K | 132.08,146.05 LED88.K | 132.08,138.43 LED93.K
PA9
  Bottom 0.61: SV1.4 58.42,177.8 57.15,179.07 53.34,179.07 50.8,181.61 LED23.K 49.53,186.69 48.26,187.96 48.26,194.31 | LED3.K 49.53,217.17 48.26,215.9 48.26,209.55 | 48.26,194.31 48.26,201.93 | 48.26,201.93 48.26,209.55 | 48.26,209.55 LED8.K | 48.26,201.93 LED13.K | 48.26,194.31 LED18.K
PA11
  Bottom 0.61: SV9.4 58.42,66.04 57.15,67.31 53.34,67.31 50.8,69.85 LED123.K 49.53,74.93 48.26,76.2 48.26,82.55 | LED103.K 49.53,105.41 48.26,104.14 48.26,97.79 | 48.26,90.17 48.26,82.55 | 48.26,97.79 48.26,90.17 | 48.26,97.79 LED108.K | 48.26,90.17 LED113.K | 48.26,82.55 LED118.K
PA16
  Bottom 0.61: SV11.4 142.24,66.04 140.97,67.31 137.16,67.31 134.62,69.85 LED148.K 133.35,74.93 132.08,76.2 132.08,82.55 | LED128.K 133.35,105.41 132.08,104.14 132.08,97.79 | 132.08,82.55 132.08,90.17 | 132.08,90.17 132.08,97.79 | 132.08,97.79 LED133.K | 132.08,90.17 LED138.K | 132.08,82.55 LED143.K
PA19
  Bottom 0.61: SV13.4 58.42,10.16 57.15,11.43 53.34,11.43 50.8,13.97 LED173.K 49.53,19.05 48.26,20.32 48.26,26.67 | LED153.K 49.53,49.53 48.26,48.26 48.26,41.91 | 48.26,34.29 48.26,26.67 | 48.26,41.91 48.26,34.29 | 48.26,41.91 LED158.K | 48.26,34.29 LED163.K | 48.26,26.67 LED168.K
PA22
  Bottom 0.61: SV15.4 142.24,10.16 140.97,11.43 137.16,11.43 134.62,13.97 LED198.K 133.35,19.05 132.08,20.32 132.08,26.67 | LED178.K 133.35,49.53 132.08,48.26 132.08,41.91 | 132.08,34.29 132.08,26.67 | 132.08,34.29 132.08,41.91 | 132.08,41.91 LED183.K | 132.08,34.29 LED188.K | 132.08,26.67 LED193.K
PB2
  Bottom 0.61: R8.1 161.29,204.47 162.56,203.2 162.56,172.72 161.29,171.45 120.65,171.45 119.38,172.72 SV2.13
PB4
  Bottom 0.61: R7.1 162.56,212.09 163.83,210.82 163.83,171.45 162.56,170.18 118.11,170.18 116.84,171.45 SV2.14
PB5
  Bottom 0.61: R3.1 77.47,204.47 78.74,203.2 78.74,172.72 77.47,171.45 36.83,171.45 35.56,172.72 SV1.13
PB6
  Bottom 0.61: R6.1 163.83,219.71 165.1,218.44 165.1,170.18 163.83,168.91 113.03,168.91 111.76,170.18 SV2.16
PB7
  Bottom 0.61: R2.1 78.74,212.09 80.01,210.82 80.01,171.45 78.74,170.18 34.29,170.18 33.02,171.45 SV1.14
PB9
  Bottom 0.61: R1.1 80.01,219.71 81.28,218.44 81.28,170.18 80.01,168.91 29.21,168.91 27.94,170.18 SV1.16
PB10
  Bottom 0.61: R13.1 77.47,148.59 78.74,147.32 78.74,116.84 77.47,115.57 36.83,115.57 35.56,116.84 SV5.13
PB11
  Bottom 0.61: R12.1 78.74,156.21 80.01,154.94 80.01,115.57 78.74,114.3 34.29,114.3 33.02,115.57 SV5.14
PB12
  Bottom 0.61: R11.1 80.01,163.83 81.28,162.56 81.28,114.3 80.01,113.03 29.21,113.03 27.94,114.3 SV5.16
PB14
  Bottom 0.61: R18.1 161.29,148.59 162.56,147.32 162.56,116.84 161.29,115.57 120.65,115.57 119.38,116.84 SV7.13
PB15
  Bottom 0.61: R17.1 162.56,156.21 163.83,154.94 163.83,115.57 162.56,114.3 118.11,114.3 116.84,115.57 SV7.14
PB16
  Bottom 0.61: R16.1 163.83,163.83 165.1,162.56 165.1,114.3 163.83,113.03 113.03,113.03 111.76,114.3 SV7.16
PB18
  Bottom 0.61: R23.1 77.47,92.71 78.74,91.44 78.74,60.96 77.47,59.69 36.83,59.69 35.56,60.96 SV9.13
PB19
  Bottom 0.61: R22.1 78.74,100.33 80.01,99.06 80.01,59.69 78.74,58.42 34.29,58.42 33.02,59.69 SV9.14
PB20
  Bottom 0.61: R21.1 80.01,107.95 81.28,106.68 81.28,58.42 80.01,57.15 29.21,57.15 27.94,58.42 SV9.16
PB22
  Bottom 0.61: R28.1 161.29,92.71 162.56,91.44 162.56,60.96 161.29,59.69 120.65,59.69 119.38,60.96 SV11.13
PB23
  Bottom 0.61: R27.1 162.56,100.33 163.83,99.06 163.83,59.69 162.56,58.42 118.11,58.42 116.84,59.69 SV11.14
PB24
  Bottom 0.61: R26.1 163.83,107.95 165.1,106.68 165.1,58.42 163.83,57.15 113.03,57.15 111.76,58.42 SV11.16
PB26
  Bottom 0.61: R33.1 77.47,36.83 78.74,35.56 78.74,5.08 77.47,3.81 36.83,3.81 35.56,5.08 SV13.13
PB27
  Bottom 0.61: R32.1 78.74,44.45 80.01,43.18 80.01,3.81 78.74,2.54 34.29,2.54 33.02,3.81 SV13.14
PB28
  Bottom 0.61: R31.1 80.01,52.07 81.28,50.8 81.28,2.54 80.01,1.27 29.21,1.27 27.94,2.54 SV13.16
PB30
  Bottom 0.61: R38.1 161.29,36.83 162.56,35.56 162.56,5.08 161.29,3.81 120.65,3.81 119.38,5.08 SV15.13
PB31
  Bottom 0.61: R37.1 162.56,44.45 163.83,43.18 163.83,3.81 162.56,2.54 118.11,2.54 116.84,3.81 SV15.14
PB32
  Bottom 0.61: R36.1 163.83,52.07 165.1,50.8 165.1,2.54 163.83,1.27 113.03,1.27 111.76,2.54 SV15.16
PC1
  Bottom 0.61: SV2.3 144.78,177.8 142.24,180.34 LED49.K 140.97,186.69 139.7,187.96 139.7,194.31 | LED29.K 140.97,217.17 139.7,215.9 139.7,209.55 | 139.7,194.31 139.7,201.93 | 139.7,201.93 139.7,209.55 | 139.7,209.55 LED34.K | 139.7,201.93 LED39.K | 139.7,194.31 LED44.K
PC2
  Bottom 0.61: SV2.2 147.32,177.8 149.86,180.34 LED50.K 148.59,186.69 147.32,187.96 147.32,194.31 | LED30.K 148.59,217.17 147.32,215.9 147.32,209.55 | 147.32,194.31 147.32,201.93 | 147.32,201.93 147.32,209.55 | 147.32,209.55 LED35.K | 147.32,201.93 LED40.K | 147.32,194.31 LED45.K
PC3
  Bottom 0.61: SV2.7 134.62,179.07 133.35,180.34 128.27,180.34 127,181.61 LED47.K 125.73,186.69 124.46,187.96 124.46,194.31 | LED27.K 125.73,217.17 124.46,215.9 124.46,209.55 | 124.46,194.31 124.46,201.93 | 124.46,201.93 124.46,209.55 | 124.46,209.55 LED32.K | 124.46,201.93 LED37.K | 124.46,194.31 LED42.K
PC5
  Bottom 0.61: S4.1 93.42,201.22 99.06,195.58 SV4.1
PC6
  Bottom 0.61: SV5.3 60.96,121.92 58.42,124.46 LED74.K 57.15,130.81 55.88,132.08 55.88,138.43 | LED54.K 57.15,161.29 55.88,160.02 55.88,153.67 | 55.88,138.43 55.88,146.05 | 55.88,146.05 55.88,153.67 | 55.88,153.67 LED59.K | 55.88,146.05 LED64.K | 55.88,138.43 LED69.K
PC7
  Bottom 0.61: SV1.2 63.5,177.8 66.04,180.34 LED25.K 64.77,186.69 63.5,187.96 63.5,194.31 | LED5.K 64.77,217.17 63.5,215.9 63.5,209.55 | 63.5,194.31 63.5,201.93 | 63.5,201.93 63.5,209.55 | 63.5,209.55 LED10.K | 63.5,201.93 LED15.K | 63.5,194.31 LED20.K
PC8
  Bottom 0.61: SV5.2 63.5,121.92 66.04,124.46 LED75.K 64.77,130.81 63.5,132.08 63.5,138.43 | LED55.K 64.77,161.29 63.5,160.02 63.5,153.67 | 63.5,138.43 63.5,146.05 | 63.5,146.05 63.5,153.67 | 63.5,153.67 LED60.K | 63.5,146.05 LED65.K | 63.5,138.43 LED70.K
PC9
  Bottom 0.61: SV1.3 60.96,177.8 58.42,180.34 LED24.K 57.15,186.69 55.88,187.96 55.88,194.31 | LED4.K 57.15,217.17 55.88,215.9 55.88,209.55 | 55.88,194.31 55.88,201.93 | 55.88,201.93 55.88,209.55 | 55.88,209.55 LED9.K | 55.88,201.93 LED14.K | 55.88,194.31 LED19.K
PC10
  Bottom 0.61: SV5.7 50.8,123.19 49.53,124.46 44.45,124.46 43.18,125.73 LED72.K 41.91,130.81 40.64,132.08 40.64,138.43 | LED52.K 41.91,161.29 40.64,160.02 40.64,153.67 | 40.64,138.43 40.64,146.05 | 40.64,146.05 40.64,153.67 | 40.64,153.67 LED57.K | 40.64,146.05 LED62.K | 40.64,138.43 LED67.K
PC11
  Bottom 0.61: SV1.7 50.8,179.07 49.53,180.34 44.45,180.34 43.18,181.61 LED22.K 41.91,186.69 40.64,187.96 40.64,194.31 | LED2.K 41.91,217.17 40.64,215.9 40.64,209.55 | 40.64,194.31 40.64,201.93 | 40.64,201.93 40.64,209.55 | 40.64,209.55 LED7.K | 40.64,201.93 LED12.K | 40.64,194.31 LED17.K
PC14
  Bottom 0.61: S7.1 9.6,145.34 15.24,139.7 SV6.1
PC15
  Bottom 0.61: S1.1 9.6,201.22 15.24,195.58 SV3.1
PC16
  Bottom 0.61: SV7.3 144.78,121.92 142.24,124.46 LED99.K 140.97,130.81 139.7,132.08 139.7,138.43 | LED79.K 140.97,161.29 139.7,160.02 139.7,153.67 | 139.7,138.43 139.7,146.05 | 139.7,146.05 139.7,153.67 | 139.7,153.67 LED84.K | 139.7,146.05 LED89.K | 139.7,138.43 LED94.K
PC17
  Bottom 0.61: SV7.2 147.32,121.92 149.86,124.46 LED100.K 148.59,130.81 147.32,132.08 147.32,138.43 | LED80.K 148.59,161.29 147.32,160.02 147.32,153.67 | 147.32,138.43 147.32,146.05 | 147.32,146.05 147.32,153.67 | 147.32,153.67 LED85.K | 147.32,146.05 LED90.K | 147.32,138.43 LED95.K
PC18
  Bottom 0.61: SV7.7 134.62,123.19 133.35,124.46 128.27,124.46 127,125.73 LED97.K 125.73,130.81 124.46,132.08 124.46,138.43 | LED77.K 125.73,161.29 124.46,160.02 124.46,153.67 | 124.46,138.43 124.46,146.05 | 124.46,146.05 124.46,153.67 | 124.46,153.67 LED82.K | 124.46,146.05 LED87.K | 124.46,138.43 LED92.K
PC20
  Bottom 0.61: S10.1 93.42,145.34 99.06,139.7 SV8.1
PC21
  Bottom 0.61: SV9.3 60.96,66.04 58.42,68.58 LED124.K 57.15,74.93 55.88,76.2 55.88,82.55 | LED104.K 57.15,105.41 55.88,104.14 55.88,97.79 | 55.88,90.17 55.88,82.55 | 55.88,97.79 55.88,90.17 | 55.88,97.79 LED109.K | 55.88,90.17 LED114.K | 55.88,82.55 LED119.K
PC22
  Bottom 0.61: SV9.2 63.5,66.04 66.04,68.58 LED125.K 64.77,74.93 63.5,76.2 63.5,82.55 | LED105.K 64.77,105.41 63.5,104.14 63.5,97.79 | 63.5,90.17 63.5,82.55 | 63.5,97.79 63.5,90.17 | 63.5,97.79 LED110.K | 63.5,90.17 LED115.K | 63.5,82.55 LED120.K
PC23
  Bottom 0.61: SV9.7 50.8,67.31 49.53,68.58 44.45,68.58 43.18,69.85 LED122.K 41.91,74.93 40.64,76.2 40.64,82.55 | LED102.K 41.91,105.41 40.64,104.14 40.64,97.79 | 40.64,90.17 40.64,82.55 | 40.64,97.79 40.64,90.17 | 40.64,97.79 LED107.K | 40.64,90.17 LED112.K | 40.64,82.55 LED117.K
PC25
  Bottom 0.61: S13.1 9.6,89.46 15.24,83.82 SV10.1
PC26
  Bottom 0.61: SV11.3 144.78,66.04 142.24,68.58 LED149.K 140.97,74.93 139.7,76.2 139.7,82.55 | LED129.K 140.97,105.41 139.7,104.14 139.7,97.79 | 139.7,82.55 139.7,90.17 | 139.7,90.17 139.7,97.79 | 139.7,97.79 LED134.K | 139.7,90.17 LED139.K | 139.7,82.55 LED144.K
PC27
  Bottom 0.61: SV11.2 147.32,66.04 149.86,68.58 LED150.K 148.59,74.93 147.32,76.2 147.32,82.55 | LED130.K 148.59,105.41 147.32,104.14 147.32,97.79 | 147.32,82.55 147.32,90.17 | 147.32,90.17 147.32,97.79 | 147.32,97.79 LED135.K | 147.32,90.17 LED140.K | 147.32,82.55 LED145.K
PC28
  Bottom 0.61: SV11.7 134.62,67.31 133.35,68.58 128.27,68.58 127,69.85 LED147.K 125.73,74.93 124.46,76.2 124.46,82.55 | LED127.K 125.73,105.41 124.46,104.14 124.46,97.79 | 124.46,82.55 124.46,90.17 | 124.46,90.17 124.46,97.79 | 124.46,97.79 LED132.K | 124.46,90.17 LED137.K | 124.46,82.55 LED142.K
PC30
  Bottom 0.61: S16.1 93.42,89.46 99.06,83.82 SV12.1
PC31
  Bottom 0.61: SV13.3 60.96,10.16 58.42,12.7 LED174.K 57.15,19.05 55.88,20.32 55.88,26.67 | LED154.K 57.15,49.53 55.88,48.26 55.88,41.91 | 55.88,34.29 55.88,26.67 | 55.88,41.91 55.88,34.29 | 55.88,41.91 LED159.K | 55.88,34.29 LED164.K | 55.88,26.67 LED169.K
PC32
  Bottom 0.61: SV13.2 63.5,10.16 66.04,12.7 LED175.K 64.77,19.05 63.5,20.32 63.5,26.67 | LED155.K 64.77,49.53 63.5,48.26 63.5,41.91 | 63.5,34.29 63.5,26.67 | 63.5,41.91 63.5,34.29 | 63.5,41.91 LED160.K | 63.5,34.29 LED165.K | 63.5,26.67 LED170.K
PC33
  Bottom 0.61: SV13.7 50.8,11.43 49.53,12.7 44.45,12.7 43.18,13.97 LED172.K 41.91,19.05 40.64,20.32 40.64,26.67 | LED152.K 41.91,49.53 40.64,48.26 40.64,41.91 | 40.64,34.29 40.64,26.67 | 40.64,41.91 40.64,34.29 | 40.64,41.91 LED157.K | 40.64,34.29 LED162.K | 40.64,26.67 LED167.K
PC35
  Bottom 0.61: S19.1 9.6,33.58 15.24,27.94 SV14.1
PC36
  Bottom 0.61: SV15.3 144.78,10.16 142.24,12.7 LED199.K 140.97,19.05 139.7,20.32 139.7,26.67 | LED179.K 140.97,49.53 139.7,48.26 139.7,41.91 | 139.7,26.67 139.7,34.29 | 139.7,34.29 139.7,41.91 | 139.7,41.91 LED184.K | 139.7,34.29 LED189.K | 139.7,26.67 LED194.K
PC37
  Bottom 0.61: SV15.2 147.32,10.16 149.86,12.7 LED200.K 148.59,19.05 147.32,20.32 147.32,26.67 | LED180.K 148.59,49.53 147.32,48.26 147.32,41.91 | 147.32,26.67 147.32,34.29 | 147.32,34.29 147.32,41.91 | 147.32,41.91 LED185.K | 147.32,34.29 LED190.K | 147.32,26.67 LED195.K
PC38
  Bottom 0.61: SV15.7 134.62,11.43 133.35,12.7 128.27,12.7 127,13.97 LED197.K 125.73,19.05 124.46,20.32 124.46,26.67 | LED177.K 125.73,49.53 124.46,48.26 124.46,41.91 | 124.46,34.29 124.46,26.67 | 124.46,41.91 124.46,34.29 | 124.46,41.91 LED182.K | 124.46,34.29 LED187.K | 124.46,26.67 LED192.K
PC40
  Bottom 0.61: S22.1 93.42,33.58 99.06,27.94 SV16.1
PD0
  Bottom 0.61: SV1.8 48.26,177.8 46.99,179.07 36.83,179.07 35.56,180.34 LED21.K 34.29,186.69 33.02,187.96 33.02,194.31 | LED1.K 34.29,217.17 33.02,215.9 33.02,209.55 | 33.02,194.31 33.02,201.93 | 33.02,201.93 33.02,209.55 | 33.02,209.55 LED6.K | 33.02,201.93 LED11.K | 33.02,194.31 LED16.K
PD1
  Bottom 0.61: SV2.8 132.08,177.8 130.81,179.07 120.65,179.07 119.38,180.34 LED46.K 118.11,186.69 116.84,187.96 116.84,194.31 | LED26.K 118.11,217.17 116.84,215.9 116.84,209.55 | 116.84,194.31 116.84,201.93 | 116.84,201.93 116.84,209.55 | 116.84,209.55 LED31.K | 116.84,201.93 LED36.K | 116.84,194.31 LED41.K
PD4
  Bottom 0.61: R5.1 74.93,189.23 76.2,187.96 76.2,175.26 74.93,173.99 44.45,173.99 43.18,175.26 SV1.10
PD5
  Bottom 0.61: R10.1 158.75,189.23 160.02,187.96 160.02,175.26 158.75,173.99 128.27,173.99 127,175.26 SV2.10
PD6
  Bottom 0.61: R4.1 76.2,196.85 77.47,195.58 77.47,173.99 76.2,172.72 41.91,172.72 40.64,173.99 SV1.11
PD7
  Bottom 0.61: R9.1 160.02,196.85 161.29,195.58 161.29,173.99 160.02,172.72 125.73,172.72 124.46,173.99 SV2.11
PD8
  Bottom 0.61: SV5.8 48.26,121.92 46.99,123.19 36.83,123.19 35.56,124.46 LED71.K 34.29,130.81 33.02,132.08 33.02,138.43 | LED51.K 34.29,161.29 33.02,160.02 33.02,153.67 | 33.02,138.43 33.02,146.05 | 33.02,146.05 33.02,153.67 | 33.02,153.67 LED56.K | 33.02,146.05 LED61.K | 33.02,138.43 LED66.K
PD10
  Bottom 0.61: R15.1 74.93,133.35 76.2,132.08 76.2,119.38 74.93,118.11 44.45,118.11 43.18,119.38 SV5.10
PD11
  Bottom 0.61: R14.1 76.2,140.97 77.47,139.7 77.47,118.11 76.2,116.84 41.91,116.84 40.64,118.11 SV5.11
PD12
  Bottom 0.61: SV7.8 132.08,121.92 130.81,123.19 120.65,123.19 119.38,124.46 LED96.K 118.11,130.81 116.84,132.08 116.84,138.43 | LED76.K 118.11,161.29 116.84,160.02 116.84,153.67 | 116.84,138.43 116.84,146.05 | 116.84,146.05 116.84,153.67 | 116.84,153.67 LED81.K | 116.84,146.05 LED86.K | 116.84,138.43 LED91.K
PD14
  Bottom 0.61: R20.1 158.75,133.35 160.02,132.08 160.02,119.38 158.75,118.11 128.27,118.11 127,119.38 SV7.10
PD15
  Bottom 0.61: R19.1 160.02,140.97 161.29,139.7 161.29,118.11 160.02,116.84 125.73,116.84 124.46,118.11 SV7.11
PD16
  Bottom 0.61: SV9.8 48.26,66.04 46.99,67.31 36.83,67.31 35.56,68.58 LED121.K 34.29,74.93 33.02,76.2 33.02,82.55 | LED101.K 34.29,105.41 33.02,104.14 33.02,97.79 | 33.02,90.17 33.02,82.55 | 33.02,97.79 33.02,90.17 | 33.02,97.79 LED106.K | 33.02,90.17 LED111.K | 33.02,82.55 LED116.K
PD18
  Bottom 0.61: R25.1 74.93,77.47 76.2,76.2 76.2,63.5 74.93,62.23 44.45,62.23 43.18,63.5 SV9.10
PD19
  Bottom 0.61: R24.1 76.2,85.09 77.47,83.82 77.47,62.23 76.2,60.96 41.91,60.96 40.64,62.23 SV9.11
PD20
  Bottom 0.61: SV11.8 132.08,66.04 130.81,67.31 120.65,67.31 119.38,68.58 LED146.K 118.11,74.93 116.84,76.2 116.84,82.55 | LED126.K 118.11,105.41 116.84,104.14 116.84,97.79 | 116.84,82.55 116.84,90.17 | 116.84,90.17 116.84,97.79 | 116.84,97.79 LED131.K | 116.84,90.17 LED136.K | 116.84,82.55 LED141.K
PD22
  Bottom 0.61: R30.1 158.75,77.47 160.02,76.2 160.02,63.5 158.75,62.23 128.27,62.23 127,63.5 SV11.10
PD23
  Bottom 0.61: R29.1 160.02,85.09 161.29,83.82 161.29,62.23 160.02,60.96 125.73,60.96 124.46,62.23 SV11.11
PD24
  Bottom 0.61: SV13.8 48.26,10.16 46.99,11.43 36.83,11.43 35.56,12.7 LED171.K 34.29,19.05 33.02,20.32 33.02,26.67 | LED151.K 34.29,49.53 33.02,48.26 33.02,41.91 | 33.02,34.29 33.02,26.67 | 33.02,41.91 33.02,34.29 | 33.02,41.91 LED156.K | 33.02,34.29 LED161.K | 33.02,26.67 LED166.K
PD26
  Bottom 0.61: R35.1 74.93,21.59 76.2,20.32 76.2,7.62 74.93,6.35 44.45,6.35 43.18,7.62 SV13.10
PD27
  Bottom 0.61: R34.1 76.2,29.21 77.47,27.94 77.47,6.35 76.2,5.08 41.91,5.08 40.64,6.35 SV13.11
PD28
  Bottom 0.61: SV15.8 132.08,10.16 130.81,11.43 120.65,11.43 119.38,12.7 LED196.K 118.11,19.05 116.84,20.32 116.84,26.67 | LED176.K 118.11,49.53 116.84,48.26 116.84,41.91 | 116.84,34.29 116.84,26.67 | 116.84,41.91 116.84,34.29 | 116.84,41.91 LED181.K | 116.84,34.29 LED186.K | 116.84,26.67 LED191.K
PD30
  Bottom 0.61: R40.1 158.75,21.59 160.02,20.32 160.02,7.62 158.75,6.35 128.27,6.35 127,7.62 SV15.10
PD31
  Bottom 0.61: R39.1 160.02,29.21 161.29,27.94 161.29,6.35 160.02,5.08 125.73,5.08 124.46,6.35 SV15.11
PE1
  Bottom 0.61: S3.1 29.92,198.83 25.4,194.31 SV1.17
PE2
  Bottom 0.61: S6.1 113.74,198.83 109.22,194.31 SV2.17
PE3
  Bottom 0.61: S2.1 19.76,198.68 22.86,195.58 SV1.18
PE4
  Bottom 0.61: S5.1 103.58,198.68 106.68,195.58 SV2.18
PE5
  Bottom 0.61: SV1.19 SG1.-
PE6
  Bottom 0.61: SV2.19 SG2.-
PE7
  Bottom 0.61: S9.1 29.92,142.95 25.4,138.43 SV5.17
PE8
  Bottom 0.61: S8.1 19.76,142.8 22.86,139.7 SV5.18
PE9
  Bottom 0.61: SG3.- SV5.19
PE10
  Bottom 0.61: S12.1 113.74,142.95 109.22,138.43 SV7.17
PE11
  Bottom 0.61: S11.1 103.58,142.8 106.68,139.7 SV7.18
PE12
  Bottom 0.61: SV7.19 SG4.-
PE13
  Bottom 0.61: S15.1 29.92,87.07 25.4,82.55 SV9.17
PE14
  Bottom 0.61: S14.1 19.76,86.92 22.86,83.82 SV9.18
PE15
  Bottom 0.61: SG5.- SV9.19
PE16
  Bottom 0.61: S18.1 113.74,87.07 109.22,82.55 SV11.17
PE17
  Bottom 0.61: S17.1 103.58,86.92 106.68,83.82 SV11.18
PE18
  Bottom 0.61: SV11.19 SG6.-
PE19
  Bottom 0.61: S21.1 29.92,31.19 25.4,26.67 SV13.17
PE20
  Bottom 0.61: S20.1 19.76,31.04 22.86,27.94 SV13.18
PE21
  Bottom 0.61: SG7.- SV13.19
PE22
  Bottom 0.61: S24.1 113.74,31.19 109.22,26.67 SV15.17
PE23
  Bottom 0.61: S23.1 103.58,31.04 106.68,27.94 SV15.18
PE24
  Bottom 0.61: SG8.- SV15.19
VDD  (1 unrouted)
VDD1  (1 unrouted)
VDD2  (1 unrouted)
VDD3  (1 unrouted)
VDD4  (1 unrouted)
VDD5  (1 unrouted)
VDD6  (1 unrouted)
VDD7  (1 unrouted)

## Text on the board
bRestrict: <<</>> | <<</>> | + | + | <<</>> | <<</>> | + | + | <<</>> | <<</>> | + | + | <<</>> | <<</>> | + | +